# EAGLE board ArduFocuser_V0.08 (EAGLE 6.3)
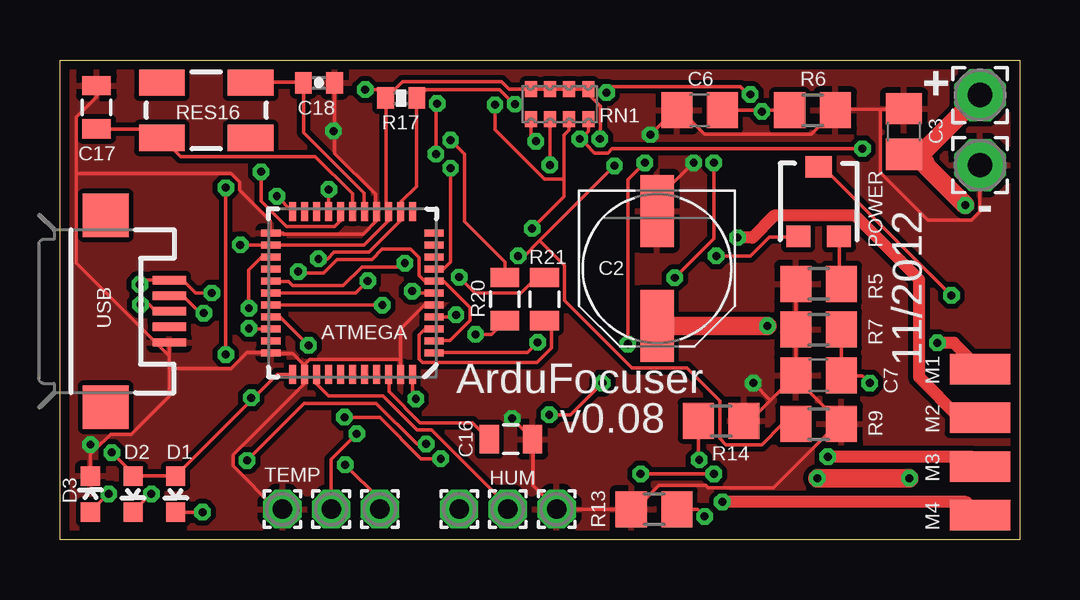
[diagram p0: board, top side]
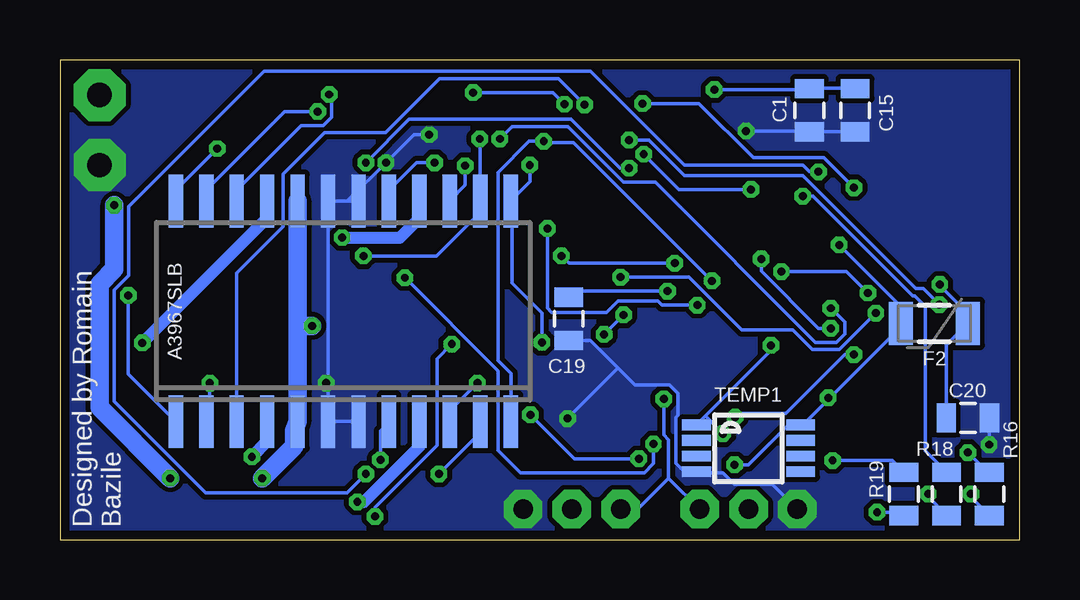
[diagram p1: board, bottom side, seen from below]

Size 40.01 x 20 mm. Coordinates in mm from the lower left corner, seen from the top.
Outline: 40.01,20 40.01,0 0,0 0,20 40.01,20
Copper layers (1*16): Top 0.0356mm / dielectric 1.5011mm / Bottom 0.0356mm
Design rules "LaenPCBOrder *": minimum track width 6mil, minimum drill 13mil, track to track 6mil, track to pad 6mil, pad to pad 6mil, via to via 6mil, smd to smd 6mil, copper to edge 15mil, drill to drill 6mil, minimum pad ring 7mil, minimum via ring 7mil, stop-mask expansion 4mil, vias tented up to drill 0mil, thermal gap 10mil
Net classes: 0 default: width 0.152 mm; 1 power: width 0.762 mm; 2 MOTOR OUT: width 0.508 mm; 3 usbvcc: width 0.152 mm; 4 aref: width 0.152 mm

## Footprints (pad centres in the part's own frame; a part is rotated, then mirrored left to right if it is on the bottom)
QFN-44-NOPAD = smd 0.8 x 0.3: 1 -3.4,2.5; 2 -3.4,2; 3 -3.4,1.5; 4 -3.4,1; 5 -3.4,0.5; 6 -3.4,0; 7 -3.4,-0.5; 8 -3.4,-1; 9 -3.4,-1.5; 10 -3.4,-2; 11 -3.4,-2.5; 23 3.4,-2.5; 24 3.4,-2; 25 3.4,-1.5; 26 3.4,-1; 27 3.4,-0.5; 28 3.4,0; 29 3.4,0.5; 30 3.4,1; 31 3.4,1.5; 32 3.4,2; 33 3.4,2.5 | smd 0.3 x 0.8: 12 -2.5,-3.4; 13 -2,-3.4; 14 -1.5,-3.4; 15 -1,-3.4; 16 -0.5,-3.4; 17 0,-3.4; 18 0.5,-3.4; 19 1,-3.4; 20 1.5,-3.4; 21 2,-3.4; 22 2.5,-3.4; 34 2.5,3.4; 35 2,3.4; 36 1.5,3.4; 37 1,3.4; 38 0.5,3.4; 39 0,3.4; 40 -0.5,3.4; 41 -1,3.4; 42 -1.5,3.4; 43 -2,3.4; 44 -2.5,3.4
0805 = smd 0.8 x 1.2: 1 -0.9,0; 2 0.9,0
PANASONIC_D@1 = smd 3 x 1.4: + 2.4,0; - -2.4,0
C0805 = smd 1.3 x 1.5: 1 -0.95,0; 2 0.95,0
0402-CAP = smd 0.7 x 0.9: 1 -0.65,0; 2 0.65,0
LED-0603 = smd 0.8 x 0.8: A 0,-0.75; C 0,0.75
PTC-1206 = smd 1 x 1.8: 1 -1.4,0; 2 1.4,0
1,6/0,8 = drill 0.813 pad 1.6 octagon: 1 0,0
SO24W = smd 0.6 x 2.2: 1 -6.985,-4.6; 2 -5.715,-4.6; 3 -4.445,-4.6; 4 -3.175,-4.6; 5 -1.905,-4.6; 6 -0.635,-4.6; 7 0.635,-4.6; 8 1.905,-4.6; 9 3.175,-4.6; 10 4.445,-4.6; 11 5.715,-4.6; 12 6.985,-4.6; 13 6.985,4.6; 14 5.715,4.6; 15 4.445,4.6; 16 3.175,4.6; 17 1.905,4.6; 18 0.635,4.6; 19 -0.635,4.6; 20 -1.905,4.6; 21 -3.175,4.6; 22 -4.445,4.6; 23 -5.715,4.6; 24 -6.985,4.6
SMD1,27-2,54 = smd 1.27 x 2.54: 1 0,0
2,15/1,0 = drill 1.016 pad 2.159 octagon: 1 0,0
TRIMPOT-3MM = smd 1 x 0.9: 1 -0.85,-1.45; 3 0.85,-1.45 | smd 1.1 x 0.9: 2 0,1.45
R0805 = smd 1.3 x 1.5: 1 -0.95,0; 2 0.95,0
0402-RES = smd 0.7 x 0.9: 1 -0.65,0; 2 0.65,0
CRYSTAL-SMD-5X3 = smd 1.9 x 1.1: 1 -1.85,-1.15; 2 1.85,-1.15; 3 1.85,1.15; 4 -1.85,1.15
0603-ARC = smd 0.5 x 0.65: 1 -1.2,-0.625; 2 -0.4,-0.625; 3 0.4,-0.625; 4 1.2,-0.625; 5 1.2,0.625; 6 0.4,0.625; 7 -0.4,0.625; 8 -1.2,0.625
UMAX8 = smd 0.45 x 1.2: 1 -0.975,-2.175; 2 -0.325,-2.175; 3 0.325,-2.175; 4 0.975,-2.175; 5 0.975,2.175; 6 0.325,2.175; 7 -0.325,2.175; 8 -0.975,2.175
USB-MICROB = smd 0.35 x 1.4: D+ 0,2.65; D- -0.65,2.65; GND 1.3,2.65; ID 0.65,2.65; VBUS -1.3,2.65 | smd 1.8 x 1.9: MT1 -4,0; MT2 4,0

## Placement (x,y rotation side)
ATMEGA  ATMEGA32U4  [QFN-44-NOPAD]  12.19,10.29 180 top
C1  1uF  [0805]  8.76,17.91 270 bottom
C2  100uF  [PANASONIC_D@1]  24.89,11.3 270 top
C3  .1uF  [C0805]  35.18,17.02 90 top
C6  680pF  [C0805]  26.67,17.91 180 top
C7  680pF  [C0805]  31.62,6.86 180 top
C15  0.1uF  [0805]  6.86,17.91 90 bottom
C16  0.1uF  [0805]  18.8,4.19 180 top
C17  22pF  [0805]  1.52,18.03 90 top
C18  22pF  [0402-CAP]  10.79,19.05 0 top
C19  1uF  [0805]  18.8,9.21 90 bottom
C20  1uF  [0805]  2.16,5.08 180 bottom
D1  Yellow  [LED-0603]  4.83,1.91 180 top
D2  Green  [LED-0603]  3.05,1.91 180 top
D3  Red  [LED-0603]  1.27,1.91 0 top
F2  500mA  [PTC-1206]  3.56,9.02 180 bottom
HUM  [1,6/0,8]  18.67,1.27 0 top
IC3  A3967SLB  [SO24W]  28.19,9.53 0 bottom
M1  [SMD1,27-2,54]  38.35,7.11 90 top
M2  [SMD1,27-2,54]  38.35,5.08 90 top
M3  [SMD1,27-2,54]  38.35,3.05 90 top
M4  [SMD1,27-2,54]  38.35,1.02 270 top
PAD5  [1,6/0,8]  16.64,1.27 0 top
PAD7  [1,6/0,8]  20.7,1.27 0 top
PAD8  [1,6/0,8]  9.27,1.27 0 top
PAD10  [1,6/0,8]  13.34,1.27 0 top
PAD11  [2,15/1,0]  38.35,15.62 0 top
PAD12  [2,15/1,0]  38.35,18.54 0 top
POWER  [TRIMPOT-3MM]  31.62,14.1 0 top
R5  5.1K  [R0805]  31.62,10.67 0 top
R6  20K  [R0805]  31.37,17.91 180 top
R7  20K  [R0805]  31.62,8.76 0 top
R9  10K  [R0805]  31.62,4.83 180 top
R13  .75  [R0805]  24.77,1.27 0 top
R14  .75  [R0805]  27.56,4.95 180 top
R16  1K  [0805]  1.27,1.91 90 bottom
R17  10K  [0402-RES]  14.22,18.41 180 top
R18  330  [0805]  3.05,1.91 270 bottom
R19  330  [0805]  4.83,1.91 270 bottom
R20  22  [0805]  18.54,10.03 90 top
R21  22  [0805]  20.19,10.03 90 top
RES16  16MHz  [CRYSTAL-SMD-5X3]  6.1,17.91 180 top
RN1  10K  [0603-ARC]  20.83,18.16 0 top
TEMP  [1,6/0,8]  11.3,1.27 0 top
TEMP1  DS18B20U  [UMAX8]  11.3,3.81 270 bottom
U$3  [OSHW-LOGO-M]  21.72,25.15 0 top  (outside the outline)
USB  USB-MICROB  [USB-MICROB]  1.91,9.53 270 top

## Library data of the parts
ATMEGA C1 C15-C20 D1-D3 F2 POWER R16-R21 RES16 U$3 USB = SparkFun
C2 C3 C6 C7 R5-R7 R9 R13 R14 = rcl
HUM M1-M4 PAD5 PAD7 PAD8 PAD10-PAD12 TEMP = wirepad
IC3 = Allegro
RN1 = resistor-dil; OC_FARNELL: unknown; OC_NEWARK: unknown
TEMP1 = 1wire

## Nets
1W: ATMEGA.30 TEMP1.1 TEMP.1
A0: ATMEGA.36 HUM.1
A1: ATMEGA.37
A2: ATMEGA.38
A3: ATMEGA.39
A4: ATMEGA.40
A5: ATMEGA.41
AREF: ATMEGA.42 C16.2
D11: ATMEGA.12
D12: ATMEGA.26
D13: ATMEGA.32
D17: ATMEGA.8 R19.1
D+: ATMEGA.4 R20.1
D-: ATMEGA.3 R21.1
DIR: ATMEGA.18 IC3.11
ENABLE: ATMEGA.27 IC3.15 R9.2
GND: ATMEGA.5 ATMEGA.15 ATMEGA.23 ATMEGA.33 ATMEGA.35 ATMEGA.43 C1.2 C2.- C3.2 C6.2 C7.2 C15.1 C16.1 C17.2 C18.2 C19.1 C20.1 D3.C IC3.6 IC3.7 IC3.18 IC3.19 PAD7.1 PAD8.1 PAD11.1 R5.1 R6.1 R7.1 R9.1 R13.1 R14.1 TEMP1.4 USB.GND
MISO: ATMEGA.11
MOSI: ATMEGA.10
MS1: ATMEGA.28 IC3.12 RN1.1
MS2: ATMEGA.1 IC3.13 RN1.2
N$2: ATMEGA.16 C18.1 RES16.1
N$4: ATMEGA.17 C17.1 RES16.3
N$5: ATMEGA.6 C19.2
N$7: R21.2 USB.D-
N$8: IC3.8 R14.2
N$9: IC3.17 R13.2
N$10: C7.1 IC3.2 R7.2
N$11: R20.2 USB.D+
N$12: D1.C R19.2
N$13: C6.1 IC3.23 R6.2
N$14: IC3.1 POWER.2
N$15: D2.C R18.2
N$16: POWER.3 R5.2
N$38: D3.A R16.1
OUT1A [MOTOR OUT]: IC3.16 M2.1
OUT1B [MOTOR OUT]: IC3.21 M1.1
OUT2A [MOTOR OUT]: IC3.9 M4.1
OUT2B [MOTOR OUT]: IC3.4 M3.1
PFD: ATMEGA.25 IC3.24 RN1.4
RESET: ATMEGA.13 ATMEGA.31 IC3.22 R17.1
RXI: ATMEGA.20
SCK: ATMEGA.9
SLEEP: ATMEGA.29 IC3.3 RN1.3
STEP: ATMEGA.19 IC3.10
TXLED1: ATMEGA.22 R18.1
TXO: ATMEGA.21
UVCC: ATMEGA.2 ATMEGA.7 C20.2 F2.1 USB.VBUS
V+ [power]: C2.+ C3.1 IC3.5 IC3.20 PAD12.1
VCC: ATMEGA.14 ATMEGA.24 ATMEGA.34 ATMEGA.44 C1.1 C15.2 D1.A D2.A F2.2 IC3.14 PAD5.1 PAD10.1 POWER.1 R16.2 R17.2 RN1.5 RN1.6 RN1.7 RN1.8 TEMP1.8

## Tracks (layer width: path | path; a pad name or v marks a point on that pad's centre or on a via)
1W  (via drill 0.33)
  Top 0.152: v10.36,8.1 9.2,9.27 8.81,9.27 ATMEGA.30 | TEMP.1 11.3,3.35 v12.37,4.42
  Bottom 0.152: v10.36,8.1 10.36,7.9 13.11,5.16 | 13.11,5.16 13.46,4.8 TEMP1.1 | 13.11,5.16 v12.37,4.42
A0
  Top 0.152: HUM.1 18.67,1.4 15.49,4.57 14.88,4.57 13.46,5.99 11.2,5.99 10.69,6.5 ATMEGA.36
AREF
  Top 0.152: ATMEGA.42 13.72,6.88 13.72,6.17 15.01,4.88 17.2,4.88 17.88,4.19 C16.2
D17  (via drill 0.33)
  Top 0.152: v16.28,15.49 16.28,11.58 16,11.3 15.6,11.3 ATMEGA.8 | v27.25,15.72 27.25,12.55 v25.63,10.92 | v15.27,3.99 14.88,3.99 13.18,5.69 10.19,5.69 v7.8,3.3
  Bottom 0.152: v16.28,15.49 16.66,15.49 18.69,17.53 25.45,17.53 v27.25,15.72 | v25.63,10.92 21.74,7.04 21.74,3.73 20.8,2.79 15.65,2.79 15.27,3.17 v15.27,3.99 | v7.8,3.3 5.31,3.3 R19.1
D+  (via drill 0.33)
  Top 0.152: v16.51,9.37 16.43,9.3 ATMEGA.4 | v17.32,8.56 17.98,8.56 18.54,9.12 R20.1
  Bottom 0.152: v17.32,8.56 v16.51,9.37
D-
  Top 0.152: ATMEGA.3 15.57,8.76 15.19,8.76 14.96,8.53 14.96,7.54 15.11,7.39 19.89,7.39 20.5,8 20.5,8.81 20.19,9.12 R21.1
DIR  (via drill 0.33)
  Top 0.152: v8.38,15.34 8.38,14.12 9.45,13.06 11.46,13.06 11.68,13.28 11.68,13.66 ATMEGA.18 | v24.21,2.74 v27.25,2.74
  Bottom 0.152: v8.38,15.34 8.76,15.34 9.04,15.62 13.97,15.62 17.88,19.53 31.5,19.53 37.13,13.89 37.13,11.02 37.74,10.41 37.74,5.77 33.93,1.96 28.04,1.96 v27.25,2.74 | v24.21,2.74 22.48,4.47 IC3.11
ENABLE  (via drill 0.33)
  Top 0.152: v14.38,11.53 14.22,11.38 12.6,11.38 11.81,10.59 9.7,10.59 9.53,10.77 8.81,10.77 ATMEGA.27 | v19.1,11.84 19.36,11.84 19.99,12.47 | v23.11,15.6 19.99,12.47 | R9.2 30.12,4.83 29.26,3.96 27.76,3.96 27.51,4.22 27.51,5.79 26.14,7.16 23.85,7.16 21.03,9.98 21.03,11.43 19.99,12.47
  Bottom 0.152: v14.38,11.53 18.8,11.53 v19.1,11.84 | v23.11,15.6 23.11,14.78 23.75,14.15 IC3.15
GND  (via drill 0.33)
  Top 0.152: 11.46,17.04 11.46,16.1 13.16,14.4 13.16,13.74 ATMEGA.15 13.18,13.66 13.18,13.28 12.65,12.75 9.32,12.75 9.3,12.78 8.81,12.78 ATMEGA.23 8.76,12.85 8.76,13.31 7.49,14.58 7.49,14.91 7.14,15.27 0.69,15.27 | 11.46,17.04 C18.2 | v11.4,17.04 11.46,17.04 | 10.19,7.29 10.19,6.91 ATMEGA.35 10.19,6.81 10.19,6.5 7.21,3.53 7.21,3.07 9.02,1.27 PAD8.1 | 10.19,7.29 9.7,7.77 8.81,7.77 ATMEGA.33 8.71,7.8 7.8,7.8 7.14,7.14 4.55,7.14 | 14.2,7.52 14.2,8.79 15.19,9.78 15.57,9.78 ATMEGA.5 | 14.2,7.52 14.2,6.91 ATMEGA.43 | 10.19,7.29 10.41,7.52 14.2,7.52 | D3.C 1.27,3.56 1.47,3.76 | 1.47,3.76 2.11,4.39 2.97,4.39 4.55,5.97 4.55,7.14 | 4.55,7.72 4.55,8.2 USB.GND | 4.55,7.72 4.55,7.14 | 1.47,3.76 v1.27,3.96 | C17.2 1.52,18.47 0.69,17.63 0.69,15.27 | 0.69,15.27 0.69,11.53 4.5,7.72 4.55,7.72 | 34.19,17.96 32.36,17.96 R6.1 32.31,17.91 31.32,16.92 26.87,16.92 25.88,17.91 C6.2 25.65,17.88 25.6,17.88 v24.61,16.89 | 34.19,17.96 35.18,17.96 C3.2 | PAD11.1 38.35,13.69 38,13.34 36.17,13.34 34.19,15.32 34.19,17.96 | C2.- 24.89,14.2 v26.42,15.72 | R14.1 28.75,4.95 29.62,5.82 | 29.62,5.82 30.66,6.86 C7.2 | C7.2 30.63,6.76 R9.1 32.44,4.85 29.74,2.16 27.03,2.16 26.92,2.26 24.97,2.26 24,1.29 23.88,1.29 R13.1 PAD7.1 19.71,2.26 C16.1 19.66,4.24 v18.85,5.05 | C7.2 30.68,6.93 30.68,8.76 R7.1 30.68,8.81 30.68,10.67 R5.1 | 29.62,5.82 v28.91,6.53
  Bottom 0.152: 13.49,2.85 TEMP1.4 | PAD8.1 10.31,2.31 11.89,2.31 12.37,2.79 13.41,2.79 TEMP1.4 | 16.74,7.16 16.03,6.45 14.61,6.45 14.25,6.1 14.25,5.18 14.33,5.11 14.33,3.17 13.99,2.85 13.56,2.85 TEMP1.4 | 16.74,7.16 17.88,8.31 C19.1 | C15.1 C1.2 8.81,17.04 v11.4,17.04 | v1.27,3.96 C20.1 | IC3.7 IC3.6 28.83,6.53 | 27.96,14.12 IC3.19 28.83,6.53 | 27.96,14.12 IC3.18 | 27.96,14.12 27.96,14.17 v26.42,15.72 25.25,16.89 v24.61,16.89 | v28.91,6.53 28.83,6.53 | v18.85,5.05 16.74,7.16
  pour Bottom (isolate 0.203, no thermals): -0.25,-0.38 40.26,-0.38 40.26,20.19 -0.25,20.19
  pour Top (isolate 0.203): -0.25,-0.38 40.26,-0.38 40.26,20.19 -0.25,20.19
MS1  (via drill 0.33)
  Top 0.152: v19.84,16.61 19.63,16.82 19.63,17.53 RN1.1 | ATMEGA.28 12.32,10.29 v12.83,10.79
  Bottom 0.152: IC3.12 21.21,6.93 21.74,7.47 21.74,15.32 20.45,16.61 v19.84,16.61 19.79,16.56 18.59,16.56 v12.83,10.79
MS2  (via drill 0.33)
  Top 0.152: v20.42,15.62 20.42,17.53 RN1.2 | v19.91,8.23 19.48,7.8 ATMEGA.1
  Bottom 0.152: v20.42,15.62 20.42,14.94 21.21,14.15 IC3.13 21.16,14.07 21.16,10.69 19.91,9.45 v19.91,8.23
N$2
  Top 0.152: ATMEGA.16 12.68,13.69 12.68,14.45 10.16,16.97 10.16,19.05 C18.1 10.08,19.07 7.95,19.07 RES16.1
N$4
  Top 0.152: ATMEGA.17 12.19,14.43 10.64,15.98 5.03,15.98 4.27,16.74 RES16.3 4.19,16.79 3.86,17.12 C17.1
N$5  (via drill 0.33)
  Top 0.152: ATMEGA.6 14.76,10.29 v14.68,10.36
  Bottom 0.152: v14.68,10.36 18.54,10.36 C19.2
N$7  (via drill 0.33)
  Top 0.152: v16.64,10.95 17.3,10.29 19.23,10.29 19.86,10.92 R21.2 | v5.99,9.45 5.84,9.45 5.13,10.16 4.57,10.16 USB.D-
  Bottom 0.152: v16.64,10.95 13.79,10.95 11.58,8.74 9.45,8.74 8.64,7.92 7.52,7.92 v5.99,9.45
N$8  (via drill 0.33)
  Top 0.152: v26.64,3.33 26.62,3.35 R14.2
  Bottom 0.152: v26.64,3.33 26.64,4.55 26.29,4.9 IC3.8
N$9  (via drill 0.33)
  Top 0.152: R13.2 26.57,1.27 v26.87,0.96 | v23.67,8.15 23.67,15.01 v24.38,15.72
  Bottom 0.152: v26.87,0.96 26.87,1.35 24.28,3.94 24.28,7.54 v23.67,8.15 | v24.38,15.72 25.15,15.72 26.29,14.58 IC3.17
N$10  (via drill 0.33)
  Top 0.152: R7.2 C7.1 32.64,6.83 33.45,6.83 v33.76,6.53
  Bottom 0.152: v33.76,6.53 33.76,5.08 IC3.2
N$11  (via drill 0.33)
  Top 0.152: R20.2 18.54,11.58 16.87,13.26 16.87,16.08 v16.28,16.66 | v3.35,9.8 3.71,9.8 3.99,9.53 USB.D+
  Bottom 0.152: v16.28,16.66 15.44,16.66 13.97,15.19 9.04,15.19 4.32,10.46 4.01,10.46 v3.35,9.8
N$12  (via drill 0.33)
  Top 0.152: v5.94,1.14 4.83,1.14 D1.C
  Bottom 0.152: v5.94,1.14 4.95,1.14 4.83,1.02 R19.2
N$13  (via drill 0.33)
  Top 0.152: R6.2 29.26,17.91 | 29.26,17.91 C6.1 | v29.26,17.86 29.26,17.91
  Bottom 0.152: IC3.23 33.91,14.58 30.63,17.86 v29.26,17.86
N$14  (via drill 0.33)
  Top 0.152: v37.16,10.19 31.8,15.54 POWER.2
  Bottom 0.152: v37.16,10.19 37.16,6.91 IC3.1
N$15  (via drill 0.33)
  Top 0.152: v3.81,1.91 3.79,1.91 D2.C
  Bottom 0.152: v3.81,1.91 3.81,1.78 3.05,1.02 R18.2
N$16
  Top 0.152: POWER.3 32.49,12.62 32.49,10.74 R5.2
N$38  (via drill 0.33)
  Top 0.152: v2.03,1.91 2.01,1.91 D3.A
  Bottom 0.152: v2.03,1.91 2.03,1.78 1.27,1.02 R16.1
OUT1A  (via drill 0.33)
  Top 0.508: v28.25,12.6 28.85,12.6 29.77,13.51 33.15,13.51 35.81,10.85 35.81,6.78 37.52,5.08 M2.1
  Bottom 0.508: IC3.16 25.02,13.41 25.83,12.6 v28.25,12.6
OUT1B  (via drill 0.33)
  Top 0.508: v36.58,8.2 37.26,8.2 M1.1
  Bottom 0.508: IC3.21 31.37,13.41 v36.58,8.2
OUT2A  (via drill 0.33)
  Top 0.508: v27.61,1.57 37.77,1.57 M4.1
  Bottom 0.508: IC3.9 25.02,3.89 27.33,1.57 v27.61,1.57
OUT2B  (via drill 0.33)
  Top 0.508: v32,3.45 38,3.45 M3.1
  Bottom 0.508: IC3.4 31.37,4.09 v32,3.45
PFD  (via drill 0.33)
  Top 0.152: 21.92,16.71 21.92,16.48 22.28,16.13 22.84,16.13 23.01,16.31 v33.45,16.31 | 21.92,16.71 21.92,16.94 22.02,17.04 22.02,17.53 RN1.4 | v7.87,9.65 7.87,11.25 8.41,11.79 ATMEGA.25 | 21.92,16.71 v21.67,16.71
  Bottom 0.152: v33.45,16.31 35.18,14.58 IC3.24 | v7.87,9.65 7.29,9.07 7.29,8.59 7.64,8.23 8.51,8.23 15.19,14.91 16.51,14.91 18.82,17.22 21.16,17.22 v21.67,16.71
RESET  (via drill 0.33)
  Top 0.152: v7.87,8.81 7.9,8.79 ATMEGA.31 | v10.77,11.71 11.15,11.71 11.43,11.99 12.88,11.99 14.17,13.28 14.17,13.66 ATMEGA.13 14.22,13.74 14.22,14.1 14.86,14.73 R17.1 14.94,18.44 15.27,18.77 18.31,18.77 18.92,18.16 v18.97,18.16 | v28.78,18.57 28.7,18.57 28.37,18.9 23.04,18.9 v22.78,18.64
  Bottom 0.152: v7.87,8.81 8.38,8.81 10.77,11.2 v10.77,11.71 | IC3.22 32.64,14.58 29.95,17.27 29.03,17.27 28.68,17.63 28.68,18.47 v28.78,18.57 | v22.78,18.64 19.46,18.64 v18.97,18.16
SLEEP  (via drill 0.33)
  Top 0.152: 21.01,15.04 21.01,14.3 v19.68,12.98 | 21.01,15.04 21.01,16.87 21.21,17.07 21.21,17.53 RN1.3 | v13.44,9.78 8.81,9.78 ATMEGA.29 | v18.14,18.14 18.14,17.09 20.19,15.04 21.01,15.04
  Bottom 0.152: v19.68,12.98 19.68,9.65 19.51,9.47 17.22,9.47 16.74,9.96 15.09,9.96 14.91,9.78 v13.44,9.78 | IC3.3 32.64,11.12 30.71,13.06 30.71,15.24 28.98,16.97 26.44,16.97 24.18,19.23 19.23,19.23 v18.14,18.14
STEP  (via drill 0.33)
  Top 0.152: v11.2,14.61 11.2,13.69 ATMEGA.19 | v15.67,16.08 15.67,18.14 v15.72,18.19 | v6.91,7.72 v6.91,14.68 | v11.86,5.11 13.34,5.11 15.06,3.38 v15.88,3.38 | v20.4,5.21 21.29,5.21 v22.61,6.53
  Bottom 0.152: v11.2,14.61 14.2,14.61 v15.67,16.08 | v15.72,18.19 13.36,18.19 11.1,15.93 8.15,15.93 v6.91,14.68 | v6.91,7.72 7.29,7.72 9.75,5.26 11.71,5.26 v11.86,5.11 | v15.88,3.38 18.57,3.38 v20.4,5.21 | v22.61,6.53 23.75,5.38 IC3.10
TXLED1  (via drill 0.33)
  Top 0.152: v9.04,14.33 9.68,13.69 ATMEGA.22
  Bottom 0.152: v9.04,14.33 8.61,14.33 4.45,10.16 4.37,10.16 3.94,9.73 3.94,3.71 R18.1
UVCC  (via drill 0.33)
  Top 0.152: ATMEGA.2 15.6,8.31 16.26,8.31 17.09,9.14 17.09,9.68 16,10.77 15.6,10.77 ATMEGA.7 15.52,10.79 15.19,10.79 14.96,11.02 14.96,11.76 14.61,12.12 13.44,12.12 13.01,11.68 11.56,11.68 11,11.12 9.98,11.12 v9.93,11.18 | v3.33,10.64 3.5,10.82 USB.VBUS 4.62,10.79 5.16,10.79 5.66,10.29 v6.33,10.29
  Bottom 0.152: C20.2 3.05,5.08 3.05,8.13 F2.1 2.21,9.07 2.21,9.47 3.33,10.59 v3.33,10.64 | v9.93,11.18 7.21,11.18 v6.33,10.29
V+  (via drill 0.33)
  Top 0.762: 35.89,16.08 C3.1 | PAD12.1 35.89,16.08 | v29.49,8.91 24.89,8.91 C2.+ | v37.74,13.95 36.07,15.62 36.07,15.72 35.89,16.08 | v31.57,2.56 v35.41,2.56
  Bottom 0.762: IC3.20 30.1,8.91 | 30.1,8.91 IC3.5 30.25,4.55 30.25,3.89 v31.57,2.56 | v29.49,8.91 30.1,8.91 | v37.74,13.95 37.74,11.28 38.35,10.67 38.35,5.51 v35.41,2.56
VCC  (via drill 0.33)
  Top 0.152: v14.83,5.87 14.71,5.99 14.71,6.88 ATMEGA.44 | 8.03,5.87 4.88,2.72 D1.A D2.A 3.07,2.72 v2.16,3.63 | 8.03,5.87 9.04,6.88 9.68,6.88 ATMEGA.34 | v7.98,5.92 8.03,5.87 | PAD10.1 13.34,1.68 v11.89,3.12 | v27.36,11.84 28.78,11.84 29.57,12.62 30.76,12.62 POWER.1 | R17.2 13.59,18.41 13.59,13.79 13.64,13.74 ATMEGA.14 13.69,13.66 13.69,13.31 12.68,12.29 8.81,12.29 ATMEGA.24 8.71,12.29 v7.52,12.29 | R17.2 13.64,18.47 14.28,19.1 18.41,19.1 18.72,18.8 19.56,18.8 RN1.8 RN1.7 20.5,18.8 21.21,18.8 RN1.6 21.29,18.8 RN1.5 21.87,18.75 22.53,18.09 22.53,17.12 22.5,17.09 v22.5,16.71 | v12.72,18.77 13.84,18.77 R17.2
  Bottom 0.152: v14.83,5.87 14.83,4.37 14.63,4.17 14.63,2.56 | PAD10.1 14.63,2.56 | PAD5.1 15.93,1.27 14.63,2.56 | 7.94,5.88 4.98,8.84 4.98,9.02 F2.2 5.03,9.07 5.03,9.8 v7.52,12.29 | 7.94,5.88 9.02,4.8 9.12,4.8 TEMP1.8 9.2,4.75 9.68,4.75 11.3,3.12 v11.89,3.12 | v2.16,3.63 1.35,2.82 R16.2 | v7.98,5.92 7.94,5.88 | v27.36,11.84 24.31,11.84 22.48,13.66 IC3.14 22.5,14.2 v22.5,16.71 | C15.2 6.86,18.82 8.76,18.82 C1.1 8.81,18.77 v12.72,18.77

## Text on the board
tNames: + | - | 11/2012 | ArduFocuser | v0.08
bNames: Designed by Romain / Bazile